# Altium PCB landslide_gateway.PcbDoc
Units mil, origin at the board's own origin, x right, y up, seen from the top; angles counter-clockwise.
Board outline 6000 x 4000 mil, 2 copper layers (Top Layer, Bottom Layer); 82 components, 60 nets, 314 pads, 0 vias.
Unrouted connection lines stored in the file: 201.
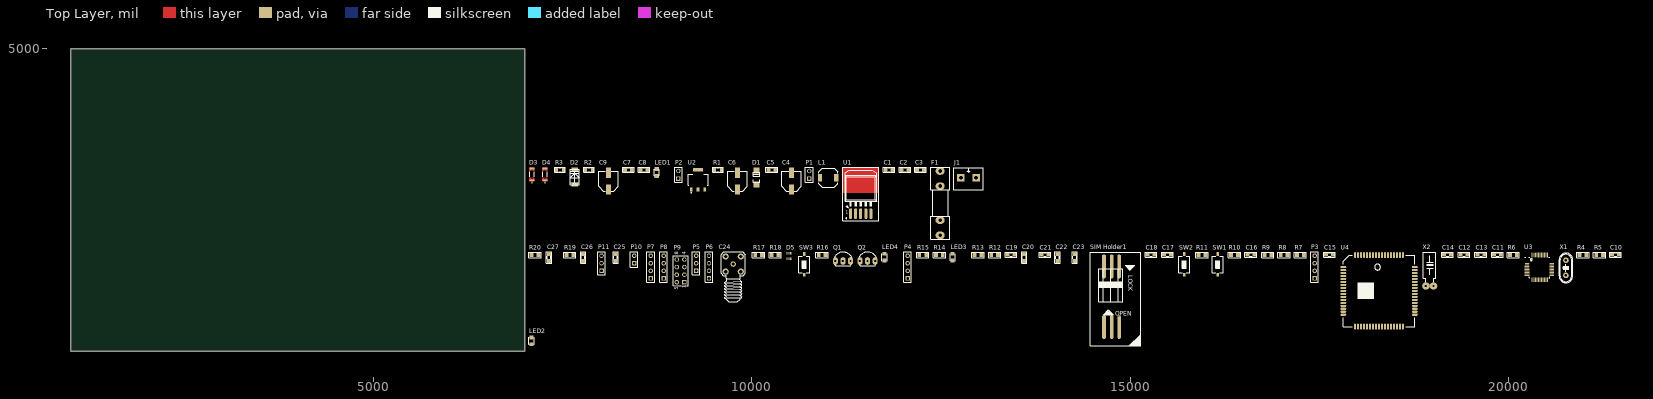
[diagram p0: Top Layer view]
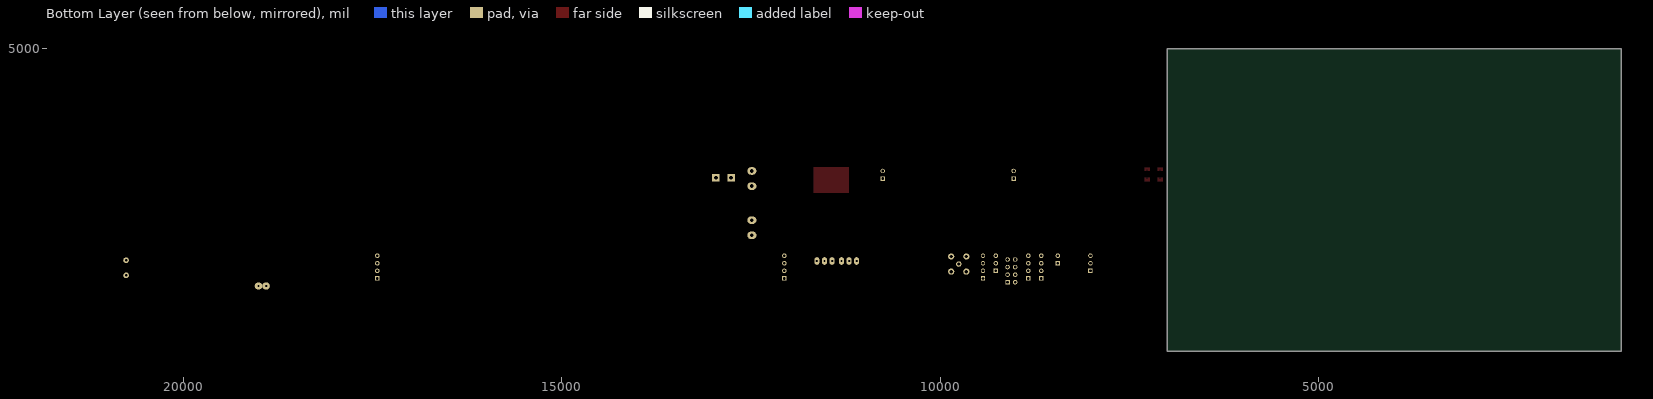
[diagram p1: Bottom Layer view, seen from below]

## Layer stack, top to bottom
Top Solder: solder mask 0.4, Solder Resist, Dk 3.5
Top Layer: signal copper 1.4
Dielectric 1: dielectric 12.6, FR-4, Dk 4.8
Bottom Layer: signal copper 1.4
Bottom Solder: solder mask 0.4, Solder Resist, Dk 3.5

## Board outline
1000,1000 7000,1000 7000,5000 1000,5000

## Design rules (kind name [scope] priority, off if disabled: settings)
Clearance [All] p1: gap=10 ignorepadtopadclearanceinfootprint=FALSE except(0: Arc-Hole Track-Hole SMDPad-Hole THPad-Hole Via-Hole Fill-Hole Poly-Hole Region-Hole Text-Hole)
PolygonConnect [All] p1: connectstyle=Relief reliefconductorwidth=10 reliefentries=4 polygonreliefangle="90 Angle" airgapwidth=10
RoomDefinition power_gateway [InComponentClass('power_gateway')] p1: confinementstyle=ConfineIn formatcopy=TRUE lockcomponents=FALSE outline 7045,2475 13070,2475 13070,3545 7045,3545
RoomDefinition mcu_gateway [InComponentClass('mcu_gateway')] p2: confinementstyle=ConfineIn formatcopy=TRUE lockcomponents=FALSE outline 7045,1060 21515,1060 21515,2425 7045,2425
RoutingVias [All] p1: holewidth=28 width=50 viastyle="Through Hole" minholewidth=28 minwidth=50 maxholewidth=28 maxwidth=50
SolderMaskExpansion [All] p1: expansion=4 istentingtop=FALSE
Width [All] p1: maxlimit=10 minlimit=10 preferedwidth=10
30 further rules are at their usual default settings.

## Classes and differential pairs
net class POWER: +3V3 +5 GND GND_MCU GND_SIM NetC7_1 NetD1_2 NetF1_1 VGSM Vin
net class 50R_ANT: GSM_ANT NetC12_2 NetC13_2
component class power_gateway: C1 C2 C3 C4 C5 C6 C7 C8 C9 D1 D2 D3 D4 F1 J1 L1 LED1 P1 P2 R1 R2 R3 U1 U2
component class mcu_gateway: C10 C11 C12 C13 C14 C15 C16 C17 C18 C19 C20 C21 C22 C23 C24 C25 C26 C27 D5 LED2 LED3 LED4 P3 P4 P5 P6 P7 P8 P9 P10 P11 Q1 Q2 R4 R5 R6 R7 R8 R9 R10 R11 R12 R13 R14 R15 R16 R17 R18 R19 R20 "SIM Holder1" SW1 SW2 SW3 U3 U4 X1 X2

## Components (designator, comment, footprint, x,y, rotation, side; value= is the part's Value field where it differs from the comment)
C1 "104" SM-0805 11815,3400 r0 top value=103
C2 "104" SM-0805 12025,3400 r0 top value=103
C3 "104" SM-0805 12230,3400 r0 top value=103
C4 "100uH/25V" CAP-ALU-SMD-6.3x7.7x2.2 10525,3250 r90 top
C5 "104" SM-0805 10265,3400 r0 top value=103
C6 "470uf/16V" CAP-ALU-SMD-6.3x7.7x2.2 9810,3250 r90 top
C7 "103" SM-0805 8370,3400 r0 top
C8 "103" SM-0805 8575,3400 r0 top
C9 "100uH/16V" CAP-ALU-SMD-6.3x7.7x2.2 8105,3250 r90 top
C10 "22pF" SM-0805 21415,2280 r0 top value=103
C11 "22pF" SM-0805 19855,2280 r0 top value=103
C12 "104" SM-0805 19415,2280 r0 top value=103
C13 "104" SM-0805 19635,2280 r0 top value=103
C14 "22pF" SM-0805 19195,2280 r0 top value=103
C15 "22pF" SM-0805 17635,2280 r0 top value=103
C16 "104" SM-0805 16595,2280 r0 top value=103
C17 "104" SM-0805 15495,2280 r0 top value=103
C18 "22pF" SM-0805 15275,2280 r0 top value=103
C19 "104" SM-0805 13425,2280 r0 top value=103
C20 "104" SM-0805 13600,2240 r90 top value=103
C21 "475" SM-0805 13875,2280 r0 top value=103
C22 "103" SM-0805 14040,2240 r90 top
C23 "105" SM-0805 14270,2240 r90 top value=103
C24 "210111003" SMA-RA 9755,2155 r0 top
C25 "104" SM-0805 8200,2240 r90 top value=103
C26 "104" SM-0805 7770,2240 r90 top value=103
C27 "104" SM-0805 7320,2240 r90 top value=103
D1 "1N5822" Diode_SS34 10065,3300 r90 top
D2 "" 1N4007_SMD 7660,3305 r90 top
D3 "TZM4V3" DIO_LL4148 7095,3340 r90 top
D4 "TZM4V3" DIO_LL4148 7265,3340 r90 top
D5 "SMF05C" SC70-6 10490,2260 r0 top
F1 "F2A" FUSE2 12490,2960 r90 top value=Fuse
J1 "KF2" KF2-5.08 12865,3295 r0 top
L1 "Inductor" inductor_smd 11010,3295 r0 top value=100uH
LED1 "LED" LED-0805-Green 8745,3320 r90 top value="LED 3 - 5 ly 2 Colour"
LED2 "LED" LED-0805-Green 7090,1095 r90 top value="LED 3 - 5 ly 2 Colour"
LED3 "LED" LED-0805-Green 12655,2200 r90 top value="LED 3 - 5 ly 2 Colour"
LED4 "LED" LED-0805-Green 11755,2200 r90 top value="LED 3 - 5 ly 2 Colour"
P1 "Header 2" HDR1X2 10760,3285 r90 top
P2 "Header 2" HDR1X2 9030,3285 r90 top
P3 "Header 4" "HDR 1X4" 17440,1965 r90 top
P4 "Header 4" HDR1X4 12060,1965 r90 top
P5 "Header 3" HDR1X3 9265,2065 r90 top
P6 "Header 4" HDR1X4 9435,1965 r90 top
P7 "Header 4" HDR1X4 8665,1965 r90 top
P8 "SSD1306" "HDR 1X4" 8835,1965 r90 top
P9 "LORA_SX1278" HDR2X4_CEN 9110,1915 r90 top
P10 "Header 2" HDR1X2 8445,2165 r90 top
P11 "Header 3" HDR1X3 8015,2065 r90 top
Q1 "2N222" TO92-123 11205,2195 r0 top value=C1815
Q2 "2N222" TO92-123 11530,2195 r0 top value=C1815
R1 "0R" RES-SMD-0805 9555,3400 r0 top
R2 "100R" RES-SMD-0805 7850,3400 r0 top
R3 "0R" RES-SMD-0805 7465,3400 r0 top
R4 "47R" R-0805 20985,2275 r0 top value=1k
R5 "47R" R-0805 21205,2275 r0 top value=1k
R6 "4k7" R-0805 20065,2275 r0 top value=1k
R7 "47R" R-0805 17250,2275 r0 top value=1k
R8 "47R" R-0805 17035,2275 r0 top value=1k
R9 "47R" R-0805 16820,2275 r0 top value=1k
R10 "4k7" R-0805 16380,2275 r0 top value=1k
R11 "100k" R-0805 15950,2275 r0 top value=1k
R12 "47R" R-0805 13210,2275 r0 top value=1k
R13 "1k" R-0805 12990,2275 r0 top
R14 "4k7" R-0805 12480,2275 r0 top value=1k
R15 "300" R-0805 12260,2275 r0 top value=1k
R16 "4k7" R-0805 10930,2275 r0 top value=1k
R17 "47k" R-0805 10090,2275 r0 top value=1k
R18 "47k" R-0805 10310,2275 r0 top value=1k
R19 "4k7" R-0805 7595,2275 r0 top value=1k
R20 "4k7" R-0805 7135,2275 r0 top value=1k
"SIM Holder1" "SIMCARD6PIN" SIMCARD6pin 14755,1725 r90 top
SW1 "RESET MCU" SW1-SMD 16160,2150 r90 top value="SW chip 2 pin"
SW2 "RESET SIM" SW1-SMD 15715,2150 r90 top value="SW chip 2 pin"
SW3 "PWR SIM" SW1-SMD 10695,2150 r90 top value="SW chip 2 pin"
U1 "LM2576" TO263 11425,3055 r0 top
U2 "AMS1117-3.3" SOT229P700X180-4N 9290,3270 r0 top
U3 "STM32F030CCT6" QFP50P900X900X160-48N 20410,2110 r0 top
U4 "SIM900" SIM900 18290,1800 r0 top
X1 "8Mhz" XT2 20760,2105 r90 top value=4Mhz
X2 "32,768 Khz" XT32k 18910,1865 r90 top value=32,768khz

## Footprints (in the part's own frame and the unit in brackets; to place one, negate y for a bottom-side part, rotate by r counter-clockwise, add the part's x,y. Pads: shape width x height; smd on the part's side, far side on the other; paste and mask are expansions set on the pad)
1N4007_SMD [mm]
  rect 1.2x2.1 smd: 1(-2.65,0) 2(2.65,0)
  silkscreen extent -2.67,-1.52 2.67,1.52, body extent -2.65,-1.8 2.65,1.8, height 2.4
CAP-ALU-SMD-6.3x7.7x2.2 [mm]
  rect 3.5x1.6 smd: 1(-2.8,0) 2(2.8,0)
  silkscreen extent -3.3,-3.3 3.3,3.3, body extent -3.65,-3.3 3.65,3.3, height 7.65
DIO_LL4148 [mm]
  rect 0.6x1.65 smd: A(1.95,0) C(-1.95,0)
  Top Layer region: 2.25,-0.825 1.15,-0.825 1.15,-0.25 1.65,-0.25 1.65,0.25 1.15,0.25 1.15,0.825 2.25,0.825
  Top Layer region: -1.15,0.25 -1.65,0.25 -1.65,-0.25 -1.15,-0.25 -1.15,-0.825 -2.24,-0.825 -2.24,0.825 -1.15,0.825
  silkscreen extent -2.8,-0.75 0.83,0.75
Diode_SS34 [mm]
  rect 2x2 smd: 1(-2.35,0) 2(2.35,0)
  silkscreen extent -1.65,-1.1 1.7,1.2, body extent -2.57,-1.82 2.73,1.78, height 2.4
FUSE2 [mil] "De Fuse"
  oval 100x120 hole 50: 1(-425,0) 1(-225,0) 2(225,0) 2(425,0)
  silkscreen extent -475,-125 475,125, body extent -448,-117 459,127, height 378
HDR1X2 [mm] "Connector; Header; 2 Position"
  rect 1.5x1.5 hole 0.9: 1(0,0)
  round 1.5 hole 0.9: 2(2.54,0)
  silkscreen extent -1.27,-1.27 3.81,1.27, body extent -1.27,-1.27 3.81,1.27, height 7
HDR1X3 [mm] "Connector; Header; 3 Position"
  rect 1.5x1.5 hole 0.9: 1(0,0)
  round 1.5 hole 0.9: 2(2.54,0) 3(5.08,0)
  silkscreen extent -1.27,-1.27 6.35,1.27, body extent -1.27,-1.27 6.35,1.27, height 7
HDR1X4 [mm] "Connector; Header; 4 Position"
  rect 1.5x1.5 hole 0.9: 1(0,0)
  round 1.5 hole 0.9: 2(2.54,0) 3(5.08,0) 4(7.62,0)
  silkscreen extent -1.27,-1.27 8.89,1.27, body extent -1.27,-1.27 8.89,1.27, height 7
HDR2X4_CEN [mm] "Connector; Header; 4x2 Position"
  rect 1.5x1.5 hole 0.9: 1(0,0)
  round 1.5 hole 0.9: 2(2.54,0) 3(5.08,0) 4(7.62,0) 5(0,2.54) 6(2.54,2.54) 7(5.08,2.54) 8(7.62,2.54)
  silkscreen extent -1.27,-1.27 8.89,3.81, body extent -1.27,-1.27 8.89,3.81, height 7
"HDR 1X4" [mm] "Connector; Header; 4 Position"
  rect 1.5x1.5 hole 0.9: 1(0,0)
  round 1.5 hole 0.9: 2(2.54,0) 3(5.08,0) 4(7.62,0)
  silkscreen extent -1.27,-1.27 8.89,1.27, body extent -1.26,-1.27 8.89,1.26, height 8.51
inductor_smd [mm] "SM Inductor; 2 Leads; Body 6.3x6.3mm (LxW)"
  rect 1.5x2.4 smd: 1(-2.75,0) 2(2.75,0)
  silkscreen extent -3.15,-3.15 3.15,3.15, body extent -3.65,-3.65 3.65,3.65, height 4
KF2-5.08 [mm]
  rect 2.5x2.5 hole 1.3: 1(-2.54,0) 2(2.54,0)
  silkscreen extent -4.95,-4.08 4.95,3.43, body extent -5,-4.07 5,3.43, height 10
LED-0805-Green [mil]
  rect 50x55 smd: 1(0,0) 2(90,0)
  silkscreen extent 0,-35 90,35, body extent 5,-25 85,25, height 43
QFP50P900X900X160-48N [mm]
  rrect70% 1.56x0.3 smd: 1(-4.18,2.75) 2(-4.18,2.25) 3(-4.18,1.75) 4(-4.18,1.25) 5(-4.18,0.75) 6(-4.18,0.25) 7(-4.18,-0.25) 8(-4.18,-0.75) 9(-4.18,-1.25) 10(-4.18,-1.75) 11(-4.18,-2.25) 12(-4.18,-2.75) 25(4.18,-2.75) 26(4.18,-2.25) 27(4.18,-1.75) 28(4.18,-1.25) 29(4.18,-0.75) 30(4.18,-0.25) 31(4.18,0.25) 32(4.18,0.75) 33(4.18,1.25) 34(4.18,1.75) 35(4.18,2.25) 36(4.18,2.75)
  rrect70% 0.3x1.56 smd: 13(-2.75,-4.18) 14(-2.25,-4.18) 15(-1.75,-4.18) 16(-1.25,-4.18) 17(-0.75,-4.18) 18(-0.25,-4.18) 19(0.25,-4.18) 20(0.75,-4.18) 21(1.25,-4.18) 22(1.75,-4.18) 23(2.25,-4.18) 24(2.75,-4.18) 37(2.75,4.18) 38(2.25,4.18) 39(1.75,4.18) 40(1.25,4.18) 41(0.75,4.18) 42(0.25,4.18) 43(-0.25,4.18) 44(-0.75,4.18) 45(-1.25,4.18) 46(-1.75,4.18) 47(-2.25,4.18) 48(-2.75,4.18)
  silkscreen extent -4.81,-3.5 3.5,3.5
R-0805 [mil] "Compoment SMD 80x50mil"
  rect 50x55 smd: 1(-45,0) 2(45,0)
  silkscreen extent -81,-39 81,39, body extent -39,-25 39,25, height 31
RES-SMD-0805 [mil]
  rect 39.37x55 smd: 1(-45,0) 2(45,0)
  silkscreen extent -70,-34 70,33, body extent -39,-25 39,25, height 31
SC70-6 [mm]
  rect 0.35x0.8 smd paste-1 mask+0: 1(-0.65,-0.95) 2(0,-0.95) 3(0.65,-0.95) 4(0.65,0.95) 5(0,0.95) 6(-0.65,0.95)
SIM900 [mm]
  oval 2x0.7 smd: 1(-12,8) 2(-12,7) 3(-12,6) 4(-12,5) 5(-12,4) 6(-12,3) 7(-12,2) 8(-12,1) 9(-12,0) 10(-12,-1) 11(-12,-2) 12(-12,-3) 13(-12,-4) 14(-12,-5) 15(-12,-6) 16(-12,-7) 17(-12,-8) 35(12,-8) 36(12,-7) 37(12,-6) 38(12,-5) 39(12,-4) 40(12,-3) 41(12,-2) 42(12,-1) 43(12,0) 44(12,1) 45(12,2) 46(12,3) 47(12,4) 48(12,5) 49(12,6) 50(12,7) 51(12,8)
  oval 0.7x2 smd: 18(-8,-12) 19(-7,-12) 20(-6,-12) 21(-5,-12) 22(-4,-12) 23(-3,-12) 24(-2,-12) 25(-1,-12) 26(0,-12) 27(1,-12) 28(2,-12) 29(3,-12) 30(4,-12) 31(5,-12) 32(6,-12) 33(7,-12) 34(8,-12) 52(8,12) 53(7,12) 54(6,12) 55(5,12) 56(4,12) 57(3,12) 58(2,12) 59(1,12) 60(0,12) 61(-1,12) 62(-2,12) 63(-3,12) 64(-4,12) 65(-5,12) 66(-6,12) 67(-7,12) 68(-8,12)
  silkscreen extent -12,-12 12,12, body extent -12,-12 12,12, height 3.02
SIMCARD6pin [mm]
  oct 8x1.2 smd: 1(10.138,2.54) 2(10.138,0) 3(10.138,-2.54) 4(-10.238,2.54) 5(-10.238,0) 6(-10.238,-2.54)
  silkscreen extent -16.56,-9.79 14.96,7.21, body extent -16.63,-9.87 13.07,7.33, height 2.35
SM-0805 [mil] "Compoment SMD 80x50mil"
  rect 50x55 smd: 1(-45,0) 2(45,0)
  silkscreen extent -77,-34 76,33, body extent -40,-27 40,23, height 24
SMA-RA [mil]
  round 72 hole 45: 1(0,0)
  round 82 hole 45: 2(-100,-100) 3(100,-100) 4(100,100) 5(-100,100)
  silkscreen extent -160,-500 160,160, body extent -136,-457 139,137, height 394
SOT229P700X180-4N [mm]
  rrect15% 0.93x1.31 smd: 1(-2.29,-3.345) 2(0,-3.345) 3(2.29,-3.345)
  rrect15% 3.24x1.31 smd: 4(0,3.345)
  silkscreen extent -3.36,-4.47 3.36,1.86
SW1-SMD [mm]
  rect 1.2x0.8 smd: 1(-3.5,0) 2(3.5,0)
  silkscreen extent -2.82,-1.85 2.82,1.85, body extent -3.05,-1.85 3.05,1.85, height 2.5
TO92-123 [mil] "TO-92"
  oval 66x100 hole 32: 1(-100,0) 2(0,0) 3(100,0)
  silkscreen extent -117,-65 120,118, body extent -109,-66 109,95, height 245
TO263 [mm]
  rrect50% 1x3.4 smd: 1(-3.019,-5.969) 2(-1.319,-5.969) 4(2.081,-5.969) 5(3.781,-5.969)
  rrect50% 1x3.4 smd mask+0: 3(0.381,-5.969)
  Top Layer region: -5.568,1.016 6.432,1.016 6.432,9.65 -5.568,9.65
  silkscreen extent -5.57,-8.35 6.43,9.65, body extent -4.73,-6.84 5.43,7.8, height 4.57
XT2 [mil] "Footpin for Crystal 2 pin"
  round 75 hole 34: 1(-100,0) 2(100,0)
  silkscreen extent -198,-90 195,90, body extent -233,-93 213,90, height 138
XT32k [mil] "Crystal 32k, 2 pin, real timer for DS1307"
  oval 95x100 hole 32: 1(0,0) 2(0,-100)
  silkscreen extent 50,-130 449,36

## Part data
C1 C2 C3 C5 C7 C8 C10 C11 C12 C13 C14 C15 C16 C17 C18 C19 C20 C21 C22 C23 C25 C26 C27: library part CM, "Cap SMD"
C4 C6 C9: library part CN-ALU-SMD, "Polarized Capacitor (Axial)", LatestRevisionDate=17-Jul-2002, LatestRevisionNote="Re-released for DXP Platform.", PackageReference=POLAR0.8, Published=8-Jun-2000, Publisher="Altium Limited"
C24: library part "CON Ant", "CONNECTOR ANTEN", Manufacturer="Würth Elektronik eiSos GmbH", ComponentLink1Description=Manufacturer, ComponentLink1URL=http://www.we-online.de, ComponentLink2Description=Datasheet, ComponentLink2URL=http://katalog.we-online.de/kataloge/eisos/index.php?language=en&pf=Filter_gerade, Created by="Christin Zierenner", Created Date="May 2012", partNo=210111003
D1: library part 1N5819, "Schottky diode"
D2: library part diode, "diode"
D3 D4: library part LL4148, "Diode Standard 100V 200mA Surface Mount SOD-80", Package="SOD-80 Taitron", Availability=Unavailable, MF="ON Semiconductor", MP=LL4148, Price=None, SnapEDA_Link=https://www.snapeda.com/parts/LL4148/ON%20Semiconductor/view-part/2182678/?ref=snap
D5: "12.5V Clamp 8A _8/20Âµs_ Ipp Tvs Diode Surface Mount SC-88/SC70-6/SOT-363", Package="SOT-363 ON Semiconductor", Availability=Unavailable, MF="ON Semiconductor", MP=SMF05C, Price=None, SnapEDA_Link=https://www.snapeda.com/parts/SMF05C/ON%20Semiconductor/view-part/2782704/?ref=snap
F1: library part Fuse, "Fuse", Designed by=VanDungEvn
J1: Manufacturer="Würth Elektronik eiSos GmbH", partNo=691103110002, ComponentLink1 Description=Manufacturer, ComponentLink1URL=http://www.we-online.com, ComponentLink2 Description=Datasheet, ComponentLink2URL=http://katalog.we-online.de/em/datasheet/6911031100xx.pdf, Created by="Karrer Zheng", Created Date="29 October 2013", NoPins=2
LED1 LED2 LED3 LED4: library part "LED SMD"
P1 P2 P10: "Header, 2-Pin", LatestRevisionDate=17-Jul-2002, LatestRevisionNote="Re-released for DXP Platform.", Publisher="Altium Limited"
P3 P4 P6 P7: "Header, 4-Pin"
  P4 P6 P7: LatestRevisionDate=17-Jul-2002, LatestRevisionNote="Re-released for DXP Platform.", Publisher="Altium Limited"
P5 P11: "Header, 3-Pin", LatestRevisionDate=17-Jul-2002, LatestRevisionNote="Re-released for DXP Platform.", Publisher="Altium Limited"
P8: library part "Header 4", "Header, 4-Pin"
P9: library part "Header 4X2A", "Header, 4-Pin, Dual row", LatestRevisionDate=17-Jul-2002, LatestRevisionNote="Re-released for DXP Platform.", Publisher="Altium Limited"
Q1 Q2: "NPN 600mW, ECB", Creat by=MT-TECH.VN
R1 R2 R3: library part Res-SMD, "Resistor", Manufacturer="Generic Components", Class=Passive, Published=08/06/2000, Publisher="Altium Hobart Technology Centre"
R4 R5 R6 R7 R8 R9 R10 R11 R12 R13 R14 R15 R16 R17 R18 R19 R20: library part resistor, "dien tro"
SW1 SW2 SW3: library part SW2, "Switch button 2 pin"
U1: Max Input Voltage="12 V", Max Output Current="3 (6.0 peak) A", Max Output Voltage=mV, Temperature Range="-40 to +125 degC", Category=IC-Power, Min Input Voltage=mV, Min Output Voltage=mV, Mounting Technology="Surface Mount", Status=Unreleased, Supply Voltage=mV
U2: "Sot223/Pkg 1-Amp 3.3-Volt Low Drop Out Voltage Regulatator", Package=None, Availability=Unavailable, MF="Advanced Monolithic Systems", MP=AMS1117-3.3, Price=None, SnapEDA_Link=https://www.snapeda.com/parts/AMS1117-3.3/Advanced%20Monolithic%20Systems/view-part/53450/?ref=snap
U3: "ARMÂ® CortexÂ®-M0 STM32F0 Microcontroller IC 32-Bit 48MHz 256KB _256K x 8_ FLASH 48-LQFP _7x7_", Package="LQFP-48 STMicroelectronics", Digi-Key_Part_Number=497-17332-2-ND, Digi-Key_Purchase_URL=https://www.digikey.com.ar/product-detail/en/stmicroelectronics/STM32F030CCT6TR/497-17332-2-ND/6833532?utm_source=snapeda&utm_medium=aggregator&utm_campaign=symbol, MF=STMicroelectronics, MP=STM32F030CCT6, SnapEDA_Link=https://www.snapeda.com/parts/STM32F030CCT6/STMicroelectronics/view-part/447161/?ref=snap
X1: library part XT2, "Crystal For all Crystal 2pin."
X2: library part XT32k, "Crystal 32,768kHz for timer real"
L1: Published=8-Jun-2000, Publisher="Altium Limited", Revision="July-2002: Re-released for DXP Platform."

## Nets (pads, with @x,y where several pads share a name; then routed paths per layer and width w, separated by ;. In a path a pad name is that pad's centre, name@x,y a point inside that pad or via, vN(x,y) a via of type N, cw(c..) or ccw(c..) an arc to the next point about the centre after c; other vN are vias at no path point)
+3V3: C8.1 C19.2 C20.2 C21.2 C22.2 C23.2 LED1.1 P2.1 P3.4 P4.3 P6.3 P7.2 P8.2 P9.4 P10.1 R10.2 R19.1 R20.1 U2.2 U3.1 U3.9 U3.24 U3.36 U3.48
+5: C6.1 L1.2 P1.1 R1.1 R3.1 U1.4
GND: C1.1 C2.1 C3.1 C4.2 C5.2 C6.2 C7.2 C8.2 C9.2 D1.1 D3.A D4.A J1.1 P1.2 P2.2 R2.2 U1.3 U1.5 U2.1
GND_MCU: C1.2 C2.2 C3.2 C10.1 C11.1 C14.1 C15.1 C16.2 C19.1 C20.1 C21.1 C22.1 C23.1 C25.2 C26.2 C27.2 LED2.2 P3.1 P4.4 P5.1 P6.4 P7.1 P8.1 P9.8 P10.2 R6.2 SW1.2 U3.8 U3.23 U3.35 U3.47
GND_SIM: "SIM Holder1.4" C12.1 C13.1 C17.2 C18.2 C24.2 C24.3 C24.4 C24.5 C25.1 C26.1 C27.1 D5.2 LED3.2 Q1.1 Q2.1 R17.2 R18.2 SW2.2 SW3.1 U4.17 U4.18 U4.29 U4.39 U4.45 U4.46 U4.53 U4.54 U4.58 U4.59 U4.61 U4.62 U4.63 U4.64 U4.65
GSM_ANT: C24.1 R4.1
LORA_DIO0: P9.1 U3.20
LORA_MISO: P9.5 U3.16
LORA_MOSI: P9.2 U3.17
LORA_NSS: P9.3 U3.18
LORA_RST: P9.7 U3.19
LORA_SCK: P9.6 U3.15
MCU_PB3: P11.1 U3.39
MCU_PB4: P11.2 U3.40
MCU_PB5: P11.3 U3.41
MCU_RX1: P4.1 U3.43
MCU_RX2: P6.1 U3.13
MCU_SIMPWR: R14.2 SW3.2 U3.29
MCU_TX1: P4.2 U3.42
MCU_TX2: P6.2 U3.12
NetC7_1: C7.1 C9.1 R1.2 U2.3
NetC12_2: C12.2 R4.2 R5.1
NetC13_2: C13.2 R5.2 U4.60
NetD1_2: D1.2 L1.1 U1.2
NetD2_1: D2.1 R3.2
NetF1_1: F1.1 J1.2
NetLED1_2: LED1.2 R2.1
NetLED2_1: LED2.1 R7.1
NetLED3_1: LED3.1 R12.1
NetLED4_2: LED4.2 R15.2
NETLIGHT: R16.2 U4.52
NetQ1_2: Q1.2 R16.1 R17.1
NetQ1_3: Q1.3 R15.1
NetQ2_2: Q2.2 R14.1 R18.1
NetQ2_3: Q2.3 R13.1
NetR6_1: R6.1 U3.44
NetR8_1: R8.1 U4.9
NetR9_1: R9.1 U4.10
NetR11_2: R11.2 U4.16
NRST: C16.1 R10.1 SW1.1 U3.7
OSC32_IN: C14.2 U3.3 X2.2
OSC32_OUT: C15.2 U3.4 X2.1
OSC_IN: C10.2 U3.5 X1.2
OSC_OUT: C11.2 U3.6 X1.1
PWRKEY: R13.2 U4.1
SIM_CLK: "SIM Holder1.3" D5.4 U4.32
SIM_DATA: "SIM Holder1.6" C17.1 D5.1 U4.31
SIM_nRST: R11.1 SW2.1 U3.32
SIM_RST: "SIM Holder1.2" D5.5 U4.33
SIM_RXD: P5.3 R8.2 U3.31
SIM_TXD: P5.2 R9.2 U3.30
SIM_VDD: "SIM Holder1.1" C18.1 D5.6 U4.30
SSD1306_SCL: P7.3 P8.3 R19.2 U3.21
SSD1306_SDA: P7.4 P8.4 R20.2 U3.22
STATUS: R12.2 U4.66
STM_STATUS: R7.2 U3.25
SWCLK: P3.3 U3.37
SWDIO: P3.2 U3.34
VGSM: D2.2 D3.C D4.C LED4.1 U4.55 U4.56 U4.57
Vin: C4.1 C5.1 F1.2 U1.1
pads on no net: "SIM Holder1.5" D5.3 U2.4 U3.2 U3.10 U3.11 U3.14 U3.26 U3.27 U3.28 U3.33 U3.38 U3.45 U3.46 U4.2 U4.3 U4.4 U4.5 U4.6 U4.7 U4.8 U4.11 U4.12 U4.13 U4.14 U4.15 U4.19 U4.20 U4.21 U4.22 U4.23 U4.24 U4.25 U4.26 U4.27 U4.28 U4.34 U4.35 U4.36 U4.37 U4.38 U4.40 U4.41 U4.42 U4.43 U4.44 U4.47 U4.48 U4.49 U4.50 U4.51 U4.67 U4.68

## Text inside footprints (layer, text, board x,y; h text height)
P9: Top Overlay "5" at 9030,1815 h50 r90; Top Overlay "1" at 9130,1835 h50 r90; Top Overlay "4" at 9130,2275 h50 r90; Top Overlay "8" at 9030,2275 h50 r90
"SIM Holder1": Top Overlay "OPEN" at 14802.67,1474.54 h60; Top Overlay "LOCK" at 14975.9,2006.03 h60 r270
U1: Top Overlay "1" at 11242.14,2822 h39.37